# Altium PCB PCB1.PcbDoc
Units mm, origin at the board's own origin, x right, y up, seen from the top; angles counter-clockwise.
Board outline 84.07 x 39.5 mm, 4 copper layers (Top Layer, Internal Plane 1, Internal Plane 2, Bottom Layer); 26 components, 34 nets, 147 pads, 0 vias.
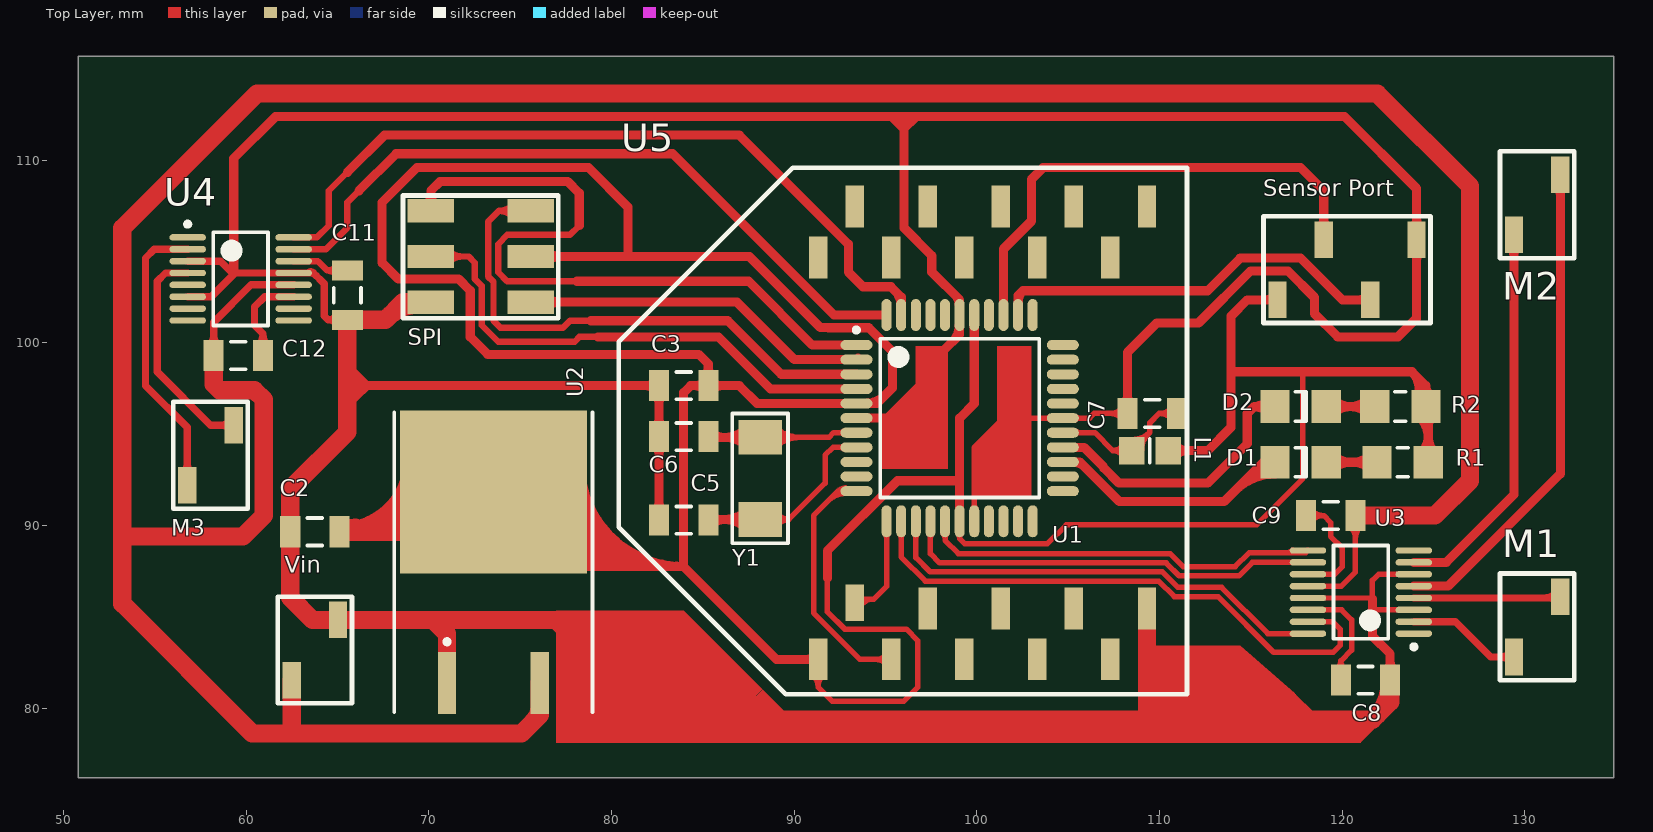
[diagram p0: Top Layer view]
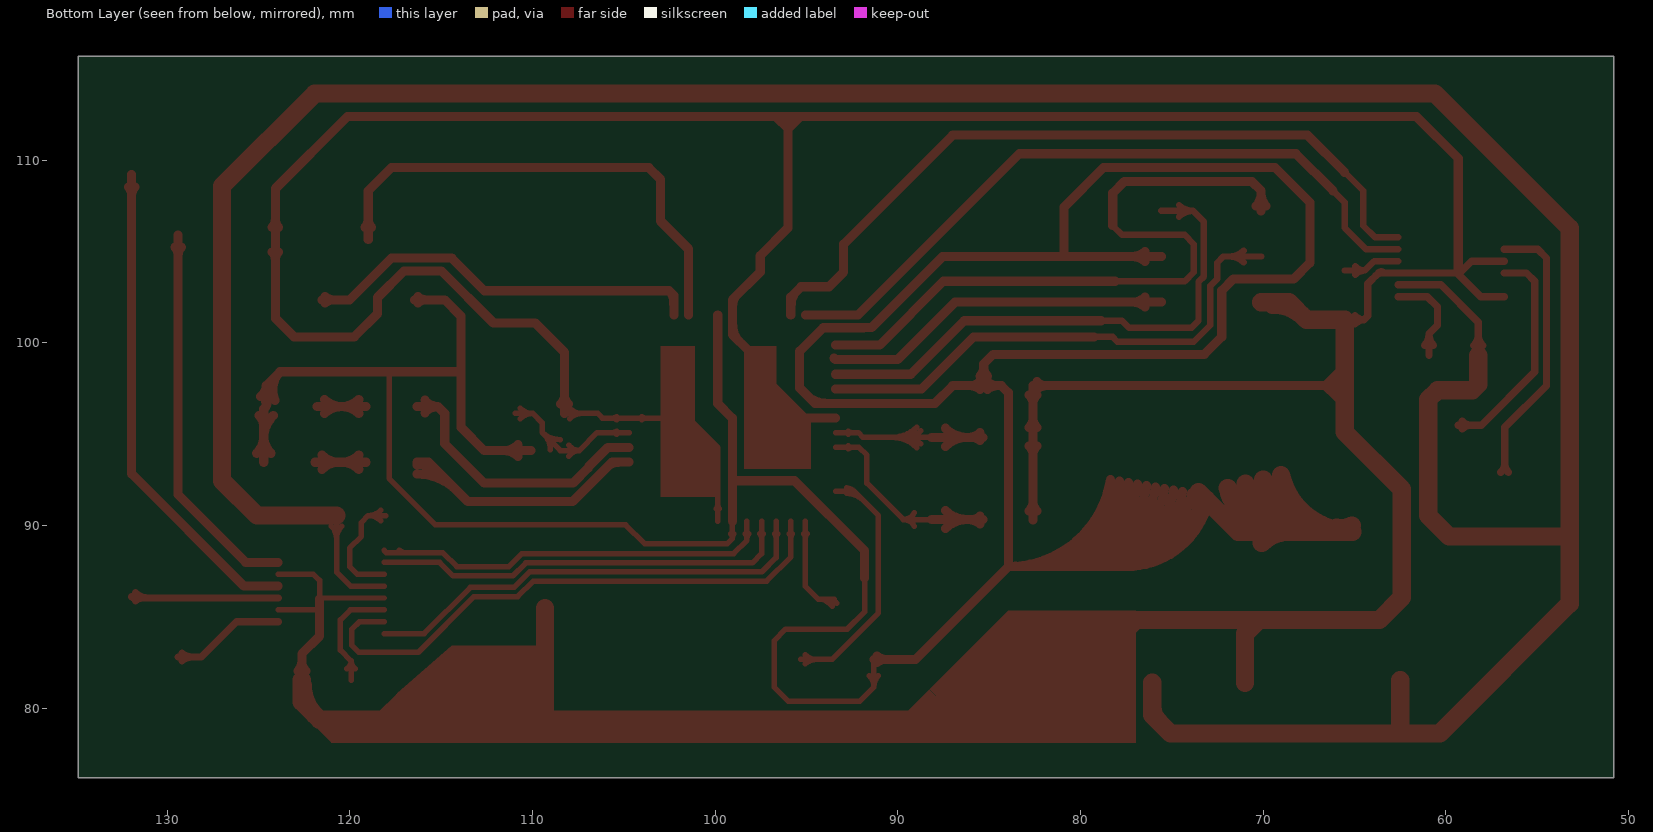
[diagram p1: Bottom Layer view, seen from below]
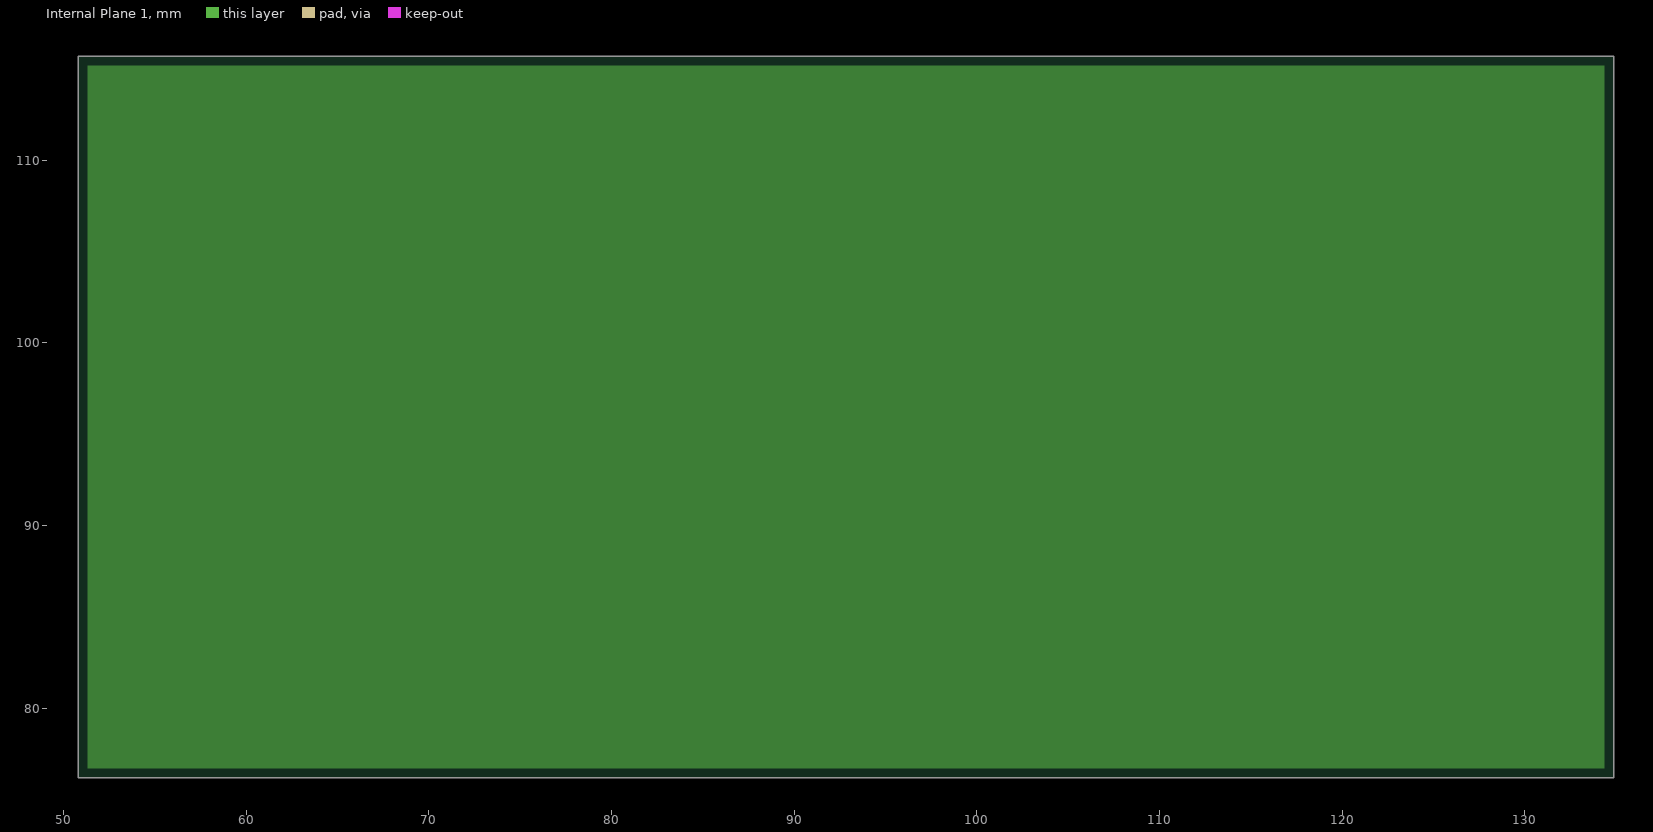
[diagram p2: Internal Plane 1, clearances drawn from the general rule]
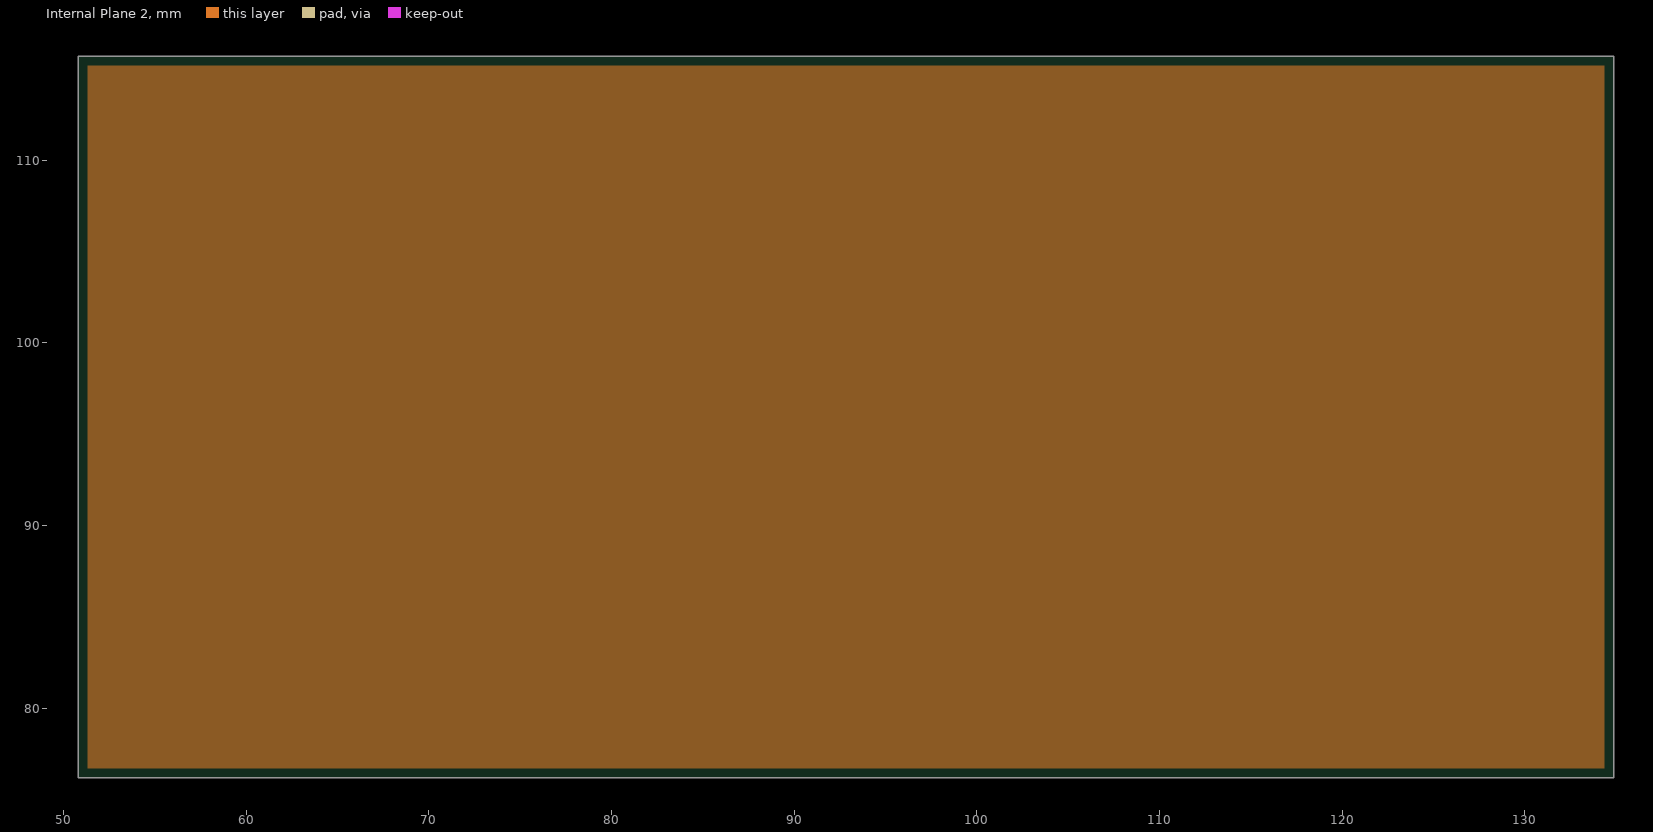
[diagram p3: Internal Plane 2, clearances drawn from the general rule]

## Layer stack, top to bottom
Top Layer: signal copper 0.0356
Dielectric: dielectric 0.32, FR-4, Dk 4.8
Internal Plane 1: plane copper 0.0356
Dielectric: dielectric 0.32, FR-4, Dk 4.8
Internal Plane 2: plane copper 0.0356
Dielectric: dielectric 0.32, FR-4, Dk 4.8
Bottom Layer: signal copper 0.0356

## Board outline
50.8,76.2 134.874,76.2 134.874,115.697 50.8,115.697

## Design rules (kind name [scope] priority, off if disabled: settings)
Clearance [All] p1: gap=0.2
ComponentClearance [All] p1 off: gap=0.254 collisioncheckmode=3 verticalgap=0.254 showdistances=FALSE
PlaneClearance [All] p1: clearance=0.508
PlaneConnect [All] p1: planeconnectstyle=Relief reliefexpansion=0.508 reliefentries=4 reliefconductorwidth=0.254 reliefairgap=0.254
PolygonConnect [All] p1: connectstyle=Relief reliefconductorwidth=0.254 reliefentries=4 polygonreliefangle="90 Angle"
RoomDefinition Schematic_v1 [InComponentClass('Schematic_v1')] p1: confinementstyle=ConfineIn formatcopy=TRUE lockcomponents=FALSE outline 51.181,76.418 134.874,76.418 134.874,115.443 51.181,115.443
RoutingVias [All] p1: holewidth=0.6 width=1 viastyle="Through Hole" minholewidth=0.711 minwidth=1.27 maxholewidth=0.711 maxwidth=1.27
SilkscreenOverComponentPads [All] p1: minsilkscreentomaskgap=0.254
SolderMaskExpansion [All] p1: expansion=0.102
Width [All] p1: maxlimit=4 minlimit=0.2 preferedwidth=0.2 minimp=50.000000 maximp=50.000000 favimp=50.000000
24 further rules are at their usual default settings.

## Components (designator, comment, footprint, x,y, rotation, side; value= is the part's Value field where it differs from the comment)
C2 "Cap" C1206 63.754,89.662 r0 top
C3 "Cap" C1206 83.947,97.663 r0 top
C5 "Cap" C1206 83.947,90.297 r0 top
C6 "Cap" C1206 83.947,94.869 r0 top
C7 "Cap" C1206 109.601,96.139 r0 top
C8 "Cap" C1206 121.285,81.534 r0 top
C9 "Cap" C1206 119.38,90.551 r0 top
C11 "Cap" C1206 65.532,102.616 r270 top
C12 "Cap" C1206 59.563,99.314 r180 top
D1 "LED0" 1206 117.729,93.472 r180 top
D2 "LED0" 1206 117.729,96.52 r180 top
L1 "Inductor" 6-0805_M 109.474,94.107 r0 top
M1 "Header 2" "SMD Header 2" 129.412,82.804 r0 top
M2 "Header 2" "SMD Header 2" 129.412,105.918 r0 top
M3 "Header 2" "SMD Header 2" 56.769,92.202 r0 top
R1 "Res1" 8-1206 123.317,93.472 r180 top
R2 "Res1" 8-1206 123.19,96.52 r180 top
"Sensor Port" "Header 4" "SMD HEADER 4" 116.459,102.362 r90 top
SPI "Header 3X2" "SMD MALE HEADER 3x2" 75.565,102.235 r180 top
U1 "ATmega1284P-AU" 44A_N 99.06,95.885 r0 top
U2 "LD1086DT33TR" TO-263 73.533,86.614 r0 top
U3 "Dual H-Bridge Motor Driver" TSSOP16_M 121.031,86.36 r180 top
U4 "Dual H-Bridge Motor Driver" TSSOP16_M 59.69,103.505 r0 top
U5 "Xbee" Xbee 91.313,82.677 r90 top
Vin "Header 2" "SMD Header 2" 62.484,81.534 r0 top
Y1 "XTAL" ECX-64A 88.138,92.583 r90 top

## Footprints (in the part's own frame and the unit in brackets; to place one, negate y for a bottom-side part, rotate by r counter-clockwise, add the part's x,y. Pads: shape width x height; smd on the part's side, far side on the other; paste and mask are expansions set on the pad)
6-0805_M [mm] "Chip Resistor, Body 2.0x1.2mm, IPC Low Density"
  rect 1.4x1.5 smd: 1(-1,0) 2(1,0)
  silkscreen extent 0,-0.65 0,0.65, body extent -1.07,-0.7 1.07,0.7, height 0.7
8-1206 [mm] "Chip Resistor; Body 3.1 x 1.6 mm (LxW typ)"
  rect 1.6x1.8 smd: 1(-1.4,0) 2(1.4,0)
  silkscreen extent -0.3,-0.8 0.3,0.8
44A_N [mm] "Thin QFP, 44-Leads, Body 10x10mm, Pitch 0.8mm, IPC Medium Density"
  oval 1.75x0.55 smd: 1(-5.65,4) 2(-5.65,3.2) 3(-5.65,2.4) 4(-5.65,1.6) 5(-5.65,0.8) 6(-5.65,0) 7(-5.65,-0.8) 8(-5.65,-1.6) 9(-5.65,-2.4) 10(-5.65,-3.2) 11(-5.65,-4) 23(5.65,-4) 24(5.65,-3.2) 25(5.65,-2.4) 26(5.65,-1.6) 27(5.65,-0.8) 28(5.65,0) 29(5.65,0.8) 30(5.65,1.6) 31(5.65,2.4) 32(5.65,3.2) 33(5.65,4)
  oval 0.55x1.75 smd: 12(-4,-5.65) 13(-3.2,-5.65) 14(-2.4,-5.65) 15(-1.6,-5.65) 16(-0.8,-5.65) 17(0,-5.65) 18(0.8,-5.65) 19(1.6,-5.65) 20(2.4,-5.65) 21(3.2,-5.65) 22(4,-5.65) 34(4,5.65) 35(3.2,5.65) 36(2.4,5.65) 37(1.6,5.65) 38(0.8,5.65) 39(0,5.65) 40(-0.8,5.65) 41(-1.6,5.65) 42(-2.4,5.65) 43(-3.2,5.65) 44(-4,5.65)
  silkscreen extent -5.77,-4.35 4.35,4.95, body extent -5,-5 5,5, height 1.2
1206 [mm] "Chip Capacitor; Body 3.2 x 1.6 mm (LxW typ)"
  rect 1.6x1.8 smd: 1(-1.4,0) 2(1.4,0)
  silkscreen extent -0.3,-0.8 0.3,0.8
C1206 [mm] "Chip Capacitor, Body 3.2x1.6mm, IPC High Density"
  rect 1.1x1.7 smd: 1(-1.35,0) 2(1.35,0)
  silkscreen extent -0.4,-0.75 0.4,0.75, body extent -1.7,-0.9 1.7,0.9, height 1.3
ECX-64A [mm]
  rect 1.9x2.4 smd: 1(-2.25,0) 2(2.25,0)
  silkscreen extent -3.56,-1.52 3.56,1.52
"SMD Header 2" [mm]
  rect 1x2 smd: 1(0,0) 2(2.54,3.3)
  silkscreen extent -0.76,-1.27 3.3,4.57
"SMD HEADER 4" [mm]
  rect 2x1 smd: 1(0,0) 2(3.3,-2.54) 3(0,-5.08) 4(3.3,-7.62)
  silkscreen extent -1.27,-8.38 4.57,0.76
"SMD MALE HEADER 3x2" [mm]
  rect 2.54x1.27 smd: 1(0,0) 2(0,-2.5) 3(0,-5) 4(5.46,-5) 5(5.46,-2.5) 6(5.46,0)
  silkscreen extent -1.52,-5.84 6.98,0.89
TO-263 [mm] "D2-PAK/TO-263-AB; 3 Leads (1 Cropped); Body 15.9 (inc. leads) x 10.4 mm (LxW max)"
  rect 1x3.4 smd: 1(-2.54,-5.225) 3(2.54,-5.225)
  rect 10.25x8.9 smd: 4(0,5.225)
  silkscreen extent -5.43,-6.83 5.43,9.57
TSSOP16_M [mm] "TSOP, 16-Leads, Body 5x4.4mm, Pitch 0.65mm, IPC Low Density"
  oval 2x0.35 smd: 1(-2.9,2.275) 2(-2.9,1.625) 3(-2.9,0.975) 4(-2.9,0.325) 5(-2.9,-0.325) 6(-2.9,-0.975) 7(-2.9,-1.625) 8(-2.9,-2.275) 9(2.9,-2.275) 10(2.9,-1.625) 11(2.9,-0.975) 12(2.9,-0.325) 13(2.9,0.325) 14(2.9,0.975) 15(2.9,1.625) 16(2.9,2.275)
  silkscreen extent -3.03,-2.55 1.5,3.12, body extent -2.25,-2.55 2.25,2.55, height 1.1
Xbee [mm]
  rect 2.29x1 smd: 1(0,0) 3(0,-4) 4(2.79,-6) 5(0,-8) 6(2.79,-10) 7(0,-12) 8(2.79,-14) 9(0,-16) 10(2.79,-18) 11(24.79,-18) 12(22,-16) 13(24.79,-14) 14(22,-12) 15(24.79,-10) 16(22,-8) 17(24.79,-6) 18(22,-4) 19(24.79,-2) 20(22,0)
  rect 2x1 smd: 2(3.102,-2)
  silkscreen extent -1.91,-20.19 26.92,10.92

## Part data
C2 C3 C5 C6 C7 C8 C9 C11 C12: "Capacitor"
D1 D2: "Typical INFRARED GaAs LED"
M1 M2 M3 Vin: "Header, 2-Pin"
R1 R2: "Resistor"
"Sensor Port": "Header, 4-Pin"
SPI: "Header, 3-Pin, Dual row"
U1: "20 MHz 8-bit AVR Microcontroller with 128KB Flash, 44-Pin TQFP Pkg, Industrial Temp"
U2: library part "Volt Reg", "Voltage Regulator"
U3 U4: library part DRV8833
Y1: "Crystal"

## Nets (pads, with @x,y where several pads share a name; then routed paths per layer and width w, separated by ;. In a path a pad name is that pad's centre, name@x,y a point inside that pad or via, vN(x,y) a via of type N, cw(c..) or ccw(c..) an arc to the next point about the centre after c; other vN are vias at no path point)
GND: "Sensor Port.4" C2.1 C3.1 C5.1 C6.1 C7.1 C8.2 C11.2 SPI.6 U1.6 U1.18 U1.28 U1.39 U2.1 U3.3 U3.6 U3.13 U4.3 U4.6 U4.13 U5.10 Vin.2 | length 302.8
  Top Layer w0.3: U1.18@99.772,90.923 ccw(c99.558,91.137) 99.86,91.137 ccw(c100.162,91.137) U1.18@99.948,90.923 ; U1.18 99.86,94.272 101.473,95.885 U1.28 106.172,95.885 106.426,96.139 C7.1 ; U1.28@104.022,95.797 ccw(c103.808,95.583) 103.808,95.885 ccw(c103.808,96.187) U1.28@104.022,95.973 ; U1.28@105.398,95.797 cw(c105.612,95.583) 105.612,95.885 cw(c105.612,96.187) U1.28@105.398,95.973 ; C7.1@107.968,95.856 ccw(c107.285,95.173) 107.285,96.139 ccw(c107.285,97.105) C7.1@107.968,96.422 ; U3.13 121.61,86.035 121.666,85.979 121.666,86.995 122.006,87.335 U3.6 ; 121.666,85.471 121.752,85.385 U3.3
  Top Layer w0.4: U4.6 58.08,102.53 59.309,103.759 59.238,103.83 ; U4.3 58.588,104.48 59.238,103.83 ; U4.13@63.4,103.85 cw(c63.53,103.677) 63.683,103.83 ; U4.13@63.415,103.855 cw(c63.415,103.268) 63.83,103.683 ; C11.2@64.967,101.038 ccw(c64.469,100.609) 64.469,101.266 ; C11.2@64.967,101.494 cw(c64.469,101.923) 64.469,101.266 ; C11.2 64.469,101.266 ; 59.238,103.83 59.309,103.83 U4.13 63.683,103.83 ; 63.683,103.83 64.262,103.251 64.262,101.473 64.469,101.266
  Top Layer w0.5: 59.309,103.83 59.309,110.109 61.595,112.395 120.142,112.395 124.079,108.458 124.079,105.662 124.079,101.346 123.063,100.33 119.761,100.33 118.491,101.6 118.491,102.489 117.032,103.948 114.997,103.948 112.141,101.092 109.855,101.092 108.251,99.488 C7.1 ; 65.532,97.663 C3.1 C6.1 C5.1 ; C5.1@82.385,90.809 ccw(c81.873,91.321) 82.597,91.321 ccw(c83.321,91.321) C5.1@82.809,90.809 ; C6.1@82.385,94.357 cw(c81.873,93.845) 82.597,93.845 cw(c83.321,93.845) C6.1@82.809,94.357 ; C6.1@82.385,95.381 ccw(c81.873,95.893) 82.597,95.893 ccw(c83.321,95.893) C6.1@82.809,95.381 ; C3.1@82.385,97.151 cw(c81.873,96.639) 82.597,96.639 cw(c83.321,96.639) C3.1@82.809,97.151 ; C3.1@82.385,97.451 ccw(c81.873,96.939) 81.873,97.663 ccw(c81.873,98.387) C3.1@82.385,97.875 ; U1.6 95.758,95.885 ; 96.012,112.395 96.012,106.299 97.536,104.775 97.536,103.886 99.06,102.362 U1.39 99.06,100.457 98.171,99.568 ; 98.679,100.076 ccw(c97.821,100.935) U1.39@99.035,100.935 ; 98.857,102.565 cw(c98.427,102.135) U1.39@99.035,102.135 ; C7.1@108.039,96.651 ccw(c107.527,97.163) 108.251,97.163 ccw(c108.975,97.163) C7.1@108.463,96.651 ; 121.666,85.979 121.666,85.471 121.666,83.947 122.635,82.978 C8.2 ; C8.2@122.423,82.046 ccw(c121.911,82.558) 122.635,82.558 ccw(c123.359,82.558) C8.2@122.847,82.046 ; 123.902,104.985 cw(c123.475,104.558) 124.079,104.558 cw(c124.683,104.558) 124.256,104.985 ; 123.902,106.339 ccw(c123.475,106.766) 124.079,106.766 ccw(c124.683,106.766) 124.256,106.339
  Top Layer w1: 67.72,101.375 cw(c69.47,99.625) SPI.6@69.47,102.1 ; SPI.6 68.58,102.235 67.611,101.266 C11.2 65.532,97.663 65.532,95.123 62.404,91.995 C2.1 62.404,86.059 63.629,84.834 Vin.2 70.233,84.834 ; U2.1 70.993,84.074 70.233,84.834 ; 109.313,79.375 U5.10 ; 121.92,79.629 ccw(c120.316,81.234) C8.2@122.585,81.234 ; C8.2 122.635,80.344 121.666,79.375 82.423,79.375 76.964,84.834 70.233,84.834
LED1: D1.2 U1.25 | length 18
  Top Layer w0.5: U1.25 105.639,93.485 107.811,91.313 113.538,91.313 115.697,93.472 D1.2 ; U1.25@105.31,93.46 cw(c105.31,92.606) 105.914,93.21 ; 114.14,91.915 cw(c116.329,89.727) D1.2@116.329,92.822 ; 114.994,92.769 cw(c116.329,91.434) D1.2@116.329,93.322
LED2: D2.2 U1.26 | length 16.8
  Top Layer w0.5: U1.26 105.867,94.285 106.943,93.209 106.943,93.171 107.785,92.329 112.649,92.329 114.808,94.488 114.808,96.139 115.189,96.52 ; D2.2@115.898,96.178 ccw(c115.189,95.614) 115.189,96.52 ; D2.2@115.898,96.862 cw(c115.189,97.426) 115.189,96.52 ; D2.2 115.189,96.52
MISO: SPI.1 U1.2 | length 20.7
  Top Layer w0.5: SPI.1 86.868,102.235 90.018,99.085 U1.2 U1.2@93.485,99.16 ; SPI.1@76.472,101.963 cw(c77.129,101.306) 77.129,102.235 cw(c77.129,103.164) SPI.1@76.472,102.507
MOSI: SPI.4 U1.1 | length 40.6
  Top Layer w0.35: 78.105,103.378 74.278,103.378 73.787,103.869 73.787,105.41 74.295,105.918 77.724,105.918 78.232,106.426
  Top Layer w0.5: SPI.4@69.833,107.507 ccw(c69.176,108.164) 70.105,108.164 ccw(c71.034,108.164) SPI.4@70.377,107.507 ; SPI.4 70.105,108.332 70.612,108.839 77.597,108.839 78.232,108.204 78.232,106.426 ; 78.105,103.378 87.503,103.378 90.996,99.885 U1.1
MOTOR1_A: U1.14 U3.16 | length 25.7
  Top Layer w0.3: U1.14@96.572,89.547 cw(c96.358,89.333) 96.66,89.333 cw(c96.962,89.333) U1.14@96.748,89.547 ; U1.14 96.66,88.252 97.45,87.462 110.165,87.462 111.013,86.614 113.411,86.614 115.94,84.085 U3.16
MOTOR1_B: U1.13 U3.15 | length 31.6
  Top Layer w0.3: U1.13@95.772,89.547 cw(c95.558,89.333) 95.86,89.333 cw(c96.162,89.333) U1.13@95.948,89.547 ; U1.13 95.86,88.29 97.188,86.962 109.958,86.962 110.814,86.106 113.212,86.106 116.26,83.058 119.507,83.058 119.888,83.439 119.888,84.328 119.481,84.735 U3.15
MOTOR2_A: U1.16 U3.9 | length 22.7
  Top Layer w0.3: U1.16@98.172,89.547 cw(c97.958,89.333) 98.26,89.333 cw(c98.562,89.333) U1.16@98.348,89.547 ; U1.16 98.26,89.192 98.99,88.462 110.579,88.462 111.292,87.749 114.145,87.749 114.906,88.51 118.003,88.51 U3.9@118.131,88.638 ; 116.944,88.51 ccw(c116.944,88.997) U3.9@117.288,88.653
MOTOR2_B: U1.15 U3.10 | length 23.7
  Top Layer w0.3: U1.15@97.372,89.547 cw(c97.158,89.333) 97.46,89.333 cw(c97.762,89.333) U1.15@97.548,89.547 ; U1.15 97.46,88.468 97.966,87.962 108.254,87.962 110.372,87.962 111.085,87.249 114.352,87.249 115.088,87.985 U3.10
MOTOR3_A: U1.43 U4.16 | length 43
  Top Layer w0.35: U4.16 63.87,105.78 64.516,106.426 64.516,108.331 65.532,109.347
  Top Layer w0.5: 65.532,109.347 67.564,111.379 86.995,111.379 92.964,105.41 92.964,103.886 93.768,103.082 95.292,103.082 95.86,102.514 U1.43 ; 95.549,102.825 cw(c94.86,102.135) U1.43@95.835,102.135
MOTOR3_B: U1.44 U4.15 | length 39.1
  Top Layer w0.35: U4.15 64.363,105.13 65.532,106.299 65.532,107.696 66.167,108.331
  Top Layer w0.5: 66.167,108.331 68.199,110.363 83.346,110.363 92.174,101.535 U1.44
NetC5_2: C5.2 U1.8 Y1.1 | length 16.4
  Top Layer w0.3: Y1.1 89.698,90.333 ; Y1.1@89.1,89.968 cw(c89.698,89.661) 89.698,90.333 ; Y1.1@89.1,90.698 ccw(c89.698,91.005) 89.698,90.333 ; U1.8@92.722,94.197 ccw(c92.508,93.983) 92.508,94.285 ccw(c92.508,94.587) U1.8@92.722,94.373 ; U1.8 92.126,94.285 91.694,93.853 91.694,92.329 89.698,90.333
  Top Layer w0.5: C5.2@85.333,90.333 Y1.1 ; C5.2@85.509,90.085 cw(c86.108,89.486) 86.108,90.333 ; C5.2@85.509,90.509 ccw(c85.934,90.934) 85.934,90.333 ; Y1.1@86.948,90.297 Y1.1@86.984,90.333 ; Y1.1@87.393,89.838 ccw(c86.198,88.643) 86.198,90.333 ccw(c86.198,92.023) Y1.1@87.393,90.828
NetC6_2: C6.2 U1.7 Y1.2 | length 17.4
  Top Layer w0.3: Y1.2 91.912,94.833 92.164,95.085 U1.7 ; Y1.2@88.742,94.479 cw(c89.595,93.626) 89.595,94.833 cw(c89.595,96.04) Y1.2@88.742,95.187 ; Y1.2@88.954,94.267 cw(c90.319,92.902) 90.319,94.833 cw(c90.319,96.764) Y1.2@88.954,95.399 ; U1.7@92.722,94.997 ccw(c92.508,94.783) 92.508,95.085 ccw(c92.508,95.387) U1.7@92.722,95.173
  Top Layer w0.35: Y1.2@86.948,94.869 Y1.2@86.984,94.833
  Top Layer w0.5: C6.2@85.333,94.833 Y1.2 ; C6.2@85.509,94.657 cw(c85.934,94.232) 85.934,94.833 ; C6.2@85.509,95.081 ccw(c86.108,95.68) 86.108,94.833 ; Y1.2@87.393,94.338 ccw(c86.198,93.143) 86.198,94.833 ccw(c86.198,96.523) Y1.2@87.393,95.328
NetC7_2: C7.2 L1.1 U1.27 | length 13.2
  Top Layer w0.3: U1.27 106.464,95.085 107.442,94.107 ; U1.27@105.398,94.997 cw(c105.612,94.783) 105.612,95.085 cw(c105.612,95.387) U1.27@105.398,95.173 ; L1.1@108.017,93.8 ccw(c107.442,93.414) 107.442,94.107 ; L1.1@108.017,94.414 cw(c107.442,94.8) 107.442,94.107 ; L1.1@108.484,94.707 ccw(c108.508,96.073) 109.474,95.107 ; L1.1@109.024,94.157 cw(c110.231,94.157) 109.378,95.011 ; C7.2@110.668,95.856 ccw(c109.985,95.173) 109.985,96.139 ccw(c109.985,97.105) C7.2@110.668,96.422 ; C7.2 109.982,96.139 109.474,95.631 109.474,95.107 ; 107.442,94.107 L1.1 109.474,95.107
NetC8_1: C8.1 U3.14 | length 7.2
  Top Layer w0.3: U3.14 119.974,85.385 120.523,84.836 120.523,83.185 119.935,82.597 ; C8.1@119.707,82.163 ccw(c119.407,82.597) 119.935,82.597 ; C8.1 119.935,82.597 ; C8.1@120.163,82.163 cw(c120.463,82.597) 119.935,82.597
NetC9_1: C9.1 U3.11 | length 7.8
  Top Layer w0.3: C9.1 118.999,90.551 119.38,90.17 119.38,89.408 120.015,88.773 120.015,87.757 119.593,87.335 U3.11 ; C9.1@118.313,90.268 cw(c118.996,89.585) 118.996,90.551 cw(c118.996,91.517) C9.1@118.313,90.834
NetC11_1: C11.1 U4.14 | length 4.3
  Top Layer w0.35: U4.14 63.922,104.48 64.436,103.966 ; C11.1@64.943,103.727 ccw(c64.436,103.309) 64.436,103.966 ; C11.1@64.943,104.205 cw(c64.436,104.623) 64.436,103.966 ; C11.1 64.436,103.966
NetC12_1: C12.1 U4.11 | length 6.6
  Top Layer w0.4: C12.1@60.666,99.861 ccw(c60.068,100.459) 60.913,100.459 ccw(c61.758,100.459) C12.1@61.16,99.861 ; C12.1 60.913,100.504 60.452,100.965 60.452,101.981 61.001,102.53 U4.11
NetD1_1: D1.1 R1.2 | length 7
  Top Layer w0.5: D1.1 R1.2 ; D1.1@119.518,93.083 cw(c120.457,92.144) 120.457,93.472 cw(c120.457,94.8) D1.1@119.518,93.861 ; R1.2@121.528,93.083 ccw(c120.589,92.144) 120.589,93.472 ccw(c120.589,94.8) R1.2@121.528,93.861
NetD2_1: D2.1 R2.2 | length 6.8
  Top Layer w0.5: D2.1 R2.2 ; D2.1@119.518,96.131 cw(c120.457,95.192) 120.457,96.52 cw(c120.457,97.848) D2.1@119.518,96.909 ; R2.2@121.401,96.131 ccw(c120.462,95.192) 120.462,96.52 ccw(c120.462,97.848) R2.2@121.401,96.909
NetM1_1: M1.1 U3.2 | length 7.4
  Top Layer w0.4: U3.2 126.212,84.735 128.143,82.804 M1.1 ; M1.1@129.2,82.592 ccw(c128.688,82.08) 128.688,82.804 ccw(c128.688,83.528) M1.1@129.2,83.016
NetM1_2: M1.2 U3.4 | length 9.2
  Top Layer w0.4: U3.4 131.883,86.035 M1.2 ; 131.061,86.035 ccw(c131.061,86.995) M1.2@131.74,86.316 ; 131.394,86.035 cw(c131.394,85.546) M1.2@131.74,85.892
NetM2_1: M2.1 U3.7 | length 22.2
  Top Layer w0.5: U3.7 125.704,87.985 129.412,91.693 M2.1 ; M2.1@129.235,105.241 cw(c128.808,104.814) 129.412,104.814 cw(c130.016,104.814) M2.1@129.589,105.241
NetM2_2: M2.2 U3.5 | length 27.9
  Top Layer w0.5: U3.5 125.801,86.685 131.952,92.836 M2.2 ; M2.2@131.775,108.541 cw(c131.348,108.114) 131.952,108.114 cw(c132.556,108.114) M2.2@132.129,108.541
NetM3_1: M3.1 U4.2 | length 16.1
  Top Layer w0.4: M3.1@56.557,92.914 ccw(c56.045,93.426) 56.769,93.426 ccw(c57.493,93.426) M3.1@56.981,92.914 ; M3.1@56.769,93.091 56.769,95.377 54.483,97.663 54.483,104.648 54.965,105.13 U4.2
NetM3_2: M3.2 U4.4 | length 13.4
  Top Layer w0.4: U4.4 55.57,103.83 55.118,103.378 55.118,98.425 58.041,95.502 M3.2 ; M3.2@59.097,95.29 ccw(c58.585,94.778) 58.585,95.502 ccw(c58.585,96.226) M3.2@59.097,95.714
RESET: SPI.5 U1.4 | length 30
  Top Layer w0.35: SPI.5 72.176,104.735 72.517,104.394 72.517,103.505 72.898,103.124 72.898,100.965 73.787,100.076 77.978,100.076 78.232,100.33 79.248,100.33 ; SPI.5@71.065,104.41 cw(c71.851,103.624) 71.851,104.735 cw(c71.851,105.846) SPI.5@71.065,105.06
  Top Layer w0.5: 79.248,100.33 85.852,100.33 88.697,97.485 U1.4
RXD: U1.11 U5.3 | length 16.8
  Top Layer w0.3: 91.885,91.377 cw(c92.81,90.452) U1.11@92.81,91.76 ; 92.397,91.889 cw(c92.81,91.476) U1.11@92.81,92.06 ; U1.11@92.722,91.797 ccw(c92.508,91.583) 92.508,91.885 ccw(c92.508,92.187) U1.11@92.722,91.973 ; U1.11 92.393,91.885 91.059,90.551 91.059,85.217 93.599,82.677 U5.3 ; U5.3@95.066,82.43 ccw(c94.468,81.832) 94.468,82.677 ccw(c94.468,83.522) U5.3@95.066,82.924
SCK: SPI.3 U1.3 | length 31.2
  Top Layer w0.35: SPI.3@74.602,106.913 ccw(c73.834,106.159) 73.834,107.235 ; SPI.3@74.602,107.557 cw(c73.834,108.311) 73.834,107.235 ; SPI.3 73.834,107.235 ; 78.867,101.219 77.724,101.219 77.343,100.838 73.914,100.838 73.533,101.219 73.533,103.345 73.237,103.641 73.237,106.638 73.834,107.235
  Top Layer w0.5: 78.867,101.219 86.36,101.219 89.294,98.285 U1.3
SENS1: "Sensor Port.2" U1.36 | length 28.5
  Top Layer w0.5: U1.36 101.46,105.143 102.997,106.68 102.997,108.966 103.632,109.601 117.729,109.601 118.999,108.331 118.999,105.662 ; 118.822,106.339 ccw(c118.395,106.766) 118.999,106.766 ccw(c119.603,106.766) 119.176,106.339
SENS2: "Sensor Port.3" U1.35 | length 23.9
  Top Layer w0.5: U1.35 102.26,102.599 102.521,102.86 ; U1.35@102.285,102.139 cw(c103.115,102.266) 102.521,102.86 ; 121.362,102.185 ccw(c120.935,101.758) 120.935,102.362 ccw(c120.935,102.966) 121.362,102.539 ; 121.539,102.362 120.015,102.362 117.729,104.648 114.427,104.648 112.639,102.86 102.521,102.86
TXD: U1.12 U5.2 | length 7.3
  Top Layer w0.3: U5.2@93.354,85.751 cw(c93.789,85.45) U5.2@93.789,85.979 ; U5.2@93.472,85.979 94.361,85.979 ; U5.2@93.601,85.58 cw(c94.361,85.056) 94.361,85.979 ; U1.12@94.972,89.547 cw(c94.758,89.333) 95.06,89.333 cw(c95.362,89.333) U1.12@95.148,89.547 ; U1.12 95.06,86.678 94.361,85.979
VCC: "Sensor Port.1" C2.2 C3.2 L1.2 R1.1 R2.1 SPI.2 U1.5 U1.17 U1.38 U2.4 U5.1 | length 344.6
  Top Layer w0.3: U5.1@91.066,81.785 cw(c90.468,81.187) 91.313,81.187 cw(c92.158,81.187) U5.1@91.56,81.785 ; U5.1 91.313,81.153 92.075,80.391 96.012,80.391 96.774,81.153 96.774,83.693 96.139,84.328 92.769,84.328 91.821,85.276 91.821,87.122 ; U1.17@98.972,89.547 cw(c98.758,89.333) 99.06,89.333 cw(c99.362,89.333) U1.17@99.148,89.547 ; U1.17 99.06,89.281 99.331,89.01 103.869,89.01 104.902,90.043 115.316,90.043 117.856,92.583 117.856,98.425
  Top Layer w0.5: U2.4@72.925,91.63 ccw(c77.479,92.371) U2.4@77.479,87.757 ; U2.4@73.418,91.711 ccw(c78.067,92.467) U2.4@78.067,87.757 ; U2.4 77.615,87.757 83.947,87.757 ; U2.4@73.912,91.791 ccw(c78.655,92.563) U2.4@78.655,87.757 ; U2.4@74.405,91.871 ccw(c79.243,92.658) 79.243,87.757 ; U2.4@74.899,91.951 ccw(c79.831,92.754) 79.831,87.757 ; U2.4@75.392,92.032 ccw(c80.419,92.85) 80.419,87.757 ; SPI.2 87.543,104.735 91.44,100.838 91.881,100.838 91.884,100.835 94.085,100.835 95.377,99.543 95.377,97.536 94.526,96.685 U1.5 87.973,96.685 86.995,97.663 C3.2 ; U2.4@75.886,92.112 ccw(c81.007,92.945) 81.007,87.757 ; U2.4@76.379,92.192 ccw(c81.595,93.041) 81.595,87.757 ; SPI.2@76.472,104.463 cw(c77.129,103.806) 77.129,104.735 cw(c77.129,105.664) SPI.2@76.472,105.007 ; U2.4@76.873,92.273 ccw(c82.183,93.137) 82.183,87.757 ; U2.4@77.366,92.353 ccw(c82.771,93.232) 82.771,87.757 ; U2.4@77.86,92.433 ccw(c83.359,93.328) 83.359,87.757 ; U2.4@78.353,92.514 ccw(c83.947,93.424) 83.947,87.757 ; 80.899,104.735 80.899,107.442 78.74,109.601 69.342,109.601 67.437,107.696 67.437,104.394 68.326,103.505 71.628,103.505 72.263,102.87 72.263,100.33 73.217,99.376 84.774,99.376 85.297,98.853 C3.2 ; C3.2@85.085,97.451 ccw(c84.573,96.939) 84.573,97.663 ccw(c84.573,98.387) C3.2@85.085,97.875 ; C3.2@85.085,98.175 ccw(c84.573,98.687) 85.297,98.687 ccw(c86.021,98.687) C3.2@85.509,98.175 ; C3.2@85.509,97.451 cw(c86.021,96.939) 86.021,97.663 cw(c86.021,98.387) C3.2@85.509,97.875 ; U5.1@91.136,82.5 ccw(c90.709,82.073) 90.709,82.677 ccw(c90.709,83.281) U5.1@91.136,82.854 ; U5.1 89.027,82.677 83.947,87.757 ; 91.821,87.122 91.821,88.621 95.656,92.456 99.06,92.456 ; U1.5@94.01,96.71 ccw(c94.01,98.016) 94.934,97.093 ; U1.17 99.06,92.456 ; U1.38 99.86,96.685 99.06,95.885 99.06,92.456 ; L1.2@110.093,94.107 112.649,94.107 113.919,95.377 113.919,98.425 ; L1.2@110.792,93.789 cw(c111.56,93.021) 111.56,94.107 cw(c111.56,95.193) L1.2@110.792,94.425 ; 116.282,102.185 ccw(c115.855,101.758) 115.855,102.362 ccw(c115.855,102.966) 116.282,102.539 ; 116.459,102.362 114.808,102.362 113.919,101.473 113.919,98.425 ; R2.1@124.094,96.857 ccw(c122.851,97.451) 123.825,98.425 ; R2.1@124.201,96.031 cw(c122.956,94.786) 124.717,94.786 ; R2.1@124.28,97.075 ccw(c123.882,97.66) 124.59,97.66 ; 124.325,97.925 cw(c123.528,97.128) R2.1@124.545,96.642 ; R1.1@124.328,93.961 ccw(c123.389,94.9) 124.717,94.9 ccw(c126.045,94.9) R1.1@125.106,93.961 ; R1.1 124.717,96.393 R2.1 124.59,97.66 ; 124.717,95.399 cw(c125.611,95.399) R2.1@124.979,96.031 ; R2.1@124.9,97.075 cw(c125.298,97.66) 124.59,97.66 ; 83.947,87.757 83.947,97.282 84.328,97.663 C3.2 ; 113.919,98.425 117.856,98.425 123.825,98.425 ; 123.825,98.425 124.59,97.66
  Top Layer w1: C2.2@65.129,90.005 ccw(c65.684,90.967) 65.971,89.894 ; 66.37,89.662 ccw(c66.37,93.381) U2.4@69.988,92.521 ; 67.635,89.662 ccw(c67.635,93.08) U2.4@70.961,92.29 ; U2.4@68.578,89.662 cw(c68.578,87.559) U2.4@70.065,89.046 ; U2.4@68.901,89.662 ccw(c68.901,92.779) U2.4@71.934,92.059 ; U2.4@69.015,92.752 cw(c65.104,93.682) 65.104,89.662 71.356,89.662 U2.4
VIN: C9.2 C12.2 U2.3 U3.12 U4.12 Vin.1 | length 189.4
  Top Layer w0.3: U3.12 119.959,86.685 120.73,87.456 C9.2 ; C9.2@120.447,89.968 cw(c119.764,89.285) 120.73,89.285 cw(c121.696,89.285) C9.2@121.013,89.968
  Top Layer w0.4: C12.2@57.966,99.861 ccw(c57.368,100.459) 58.213,100.459 ccw(c59.058,100.459) C12.2@58.46,99.861 ; C12.2 58.213,101.139 60.254,103.18 U4.12
  Top Layer w1: C12.2 58.213,97.743 58.547,97.409 60.452,97.409 60.96,96.901 60.96,90.551 59.817,89.408 53.213,89.408 ; 62.484,78.994 Vin.1 ; 75.677,79.233 ccw(c74.721,80.189) U2.3@76.073,80.189 ; U2.3 76.073,79.629 75.057,78.613 60.325,78.613 53.213,85.725 53.213,89.408 ; C9.2 125.095,90.551 127,92.456 127,108.585 121.92,113.665 60.579,113.665 53.213,106.299 53.213,89.408
pads on no net: U1.9 U1.10 U1.19 U1.20 U1.21 U1.22 U1.23 U1.24 U1.29 U1.30 U1.31 U1.32 U1.33 U1.34 U1.37 U1.40 U1.41 U1.42 U3.1 U3.8 U4.1 U4.5 U4.7 U4.8 U4.9 U4.10 U5.4 U5.5 U5.6 U5.7 U5.8 U5.9 U5.11 U5.12 U5.13 U5.14 U5.15 U5.16 U5.17 U5.18 U5.19 U5.20

## Polygon pours and split planes (outlines as drawn)
no net on Internal Plane 1 (split plane): 134.364,76.71 51.31,76.71 51.31,115.187 134.364,115.187
no net on Internal Plane 2 (split plane): 134.364,76.71 51.31,76.71 51.31,115.187 134.364,115.187

## Other copper
Top Layer:
  region net GND: 95.949,111.442 96.203,111.696 95.25,112.649 94.996,112.395
  region net GND: 95.758,111.633 96.012,111.379 96.965,112.332 96.711,112.586
  rectangle net GND: 76.962,78.105 83.947,85.344
  region net GND: 86.469,79.23 88.265,81.026 83.947,85.344 82.151,83.548
  rectangle net GND: 83.566,79.756 86.106,82.296
  region net GND: 88.898,78.983 89.603,79.688 88.265,81.026 87.56,80.321
  rectangle net GND: 86.868,79.502 88.265,80.645
  rectangle net GND: 109.347,79.629 114.427,83.439
  region net GND: 115.999,79.194 117.421,80.819 114.427,83.439 113.005,81.814
  rectangle net GND: 114.046,79.756 115.443,81.153
  rectangle net GND: 116.205,79.756 117.475,80.772
  region net GND: 117.919,79.184 118.488,79.753 117.421,80.819 116.853,80.251
  rectangle net GND: 83.058,78.105 121.031,79.248
  region net GND: 121.031,78.105 122.555,79.629 121.926,80.258 120.402,78.734
  rectangle net GND: 99.86,91.567 102.997,94.107
  rectangle net GND: 101.092,93.599 102.997,99.822
  region net GND: 101.117,93.015 102.374,94.272 101.117,95.529 99.86,94.272
  rectangle net GND: 94.742,93.091 98.425,95.885
  rectangle net GND: 96.647,94.742 98.425,99.822
  region net GND: 95.922,94.91 97.915,96.903 96.838,97.98 94.845,95.988
  region net GND: 65.977,96.711 66.929,97.663 66.04,98.552 65.088,97.6